# EAGLE board ESP8266 Relay (EAGLE 9.6.2)
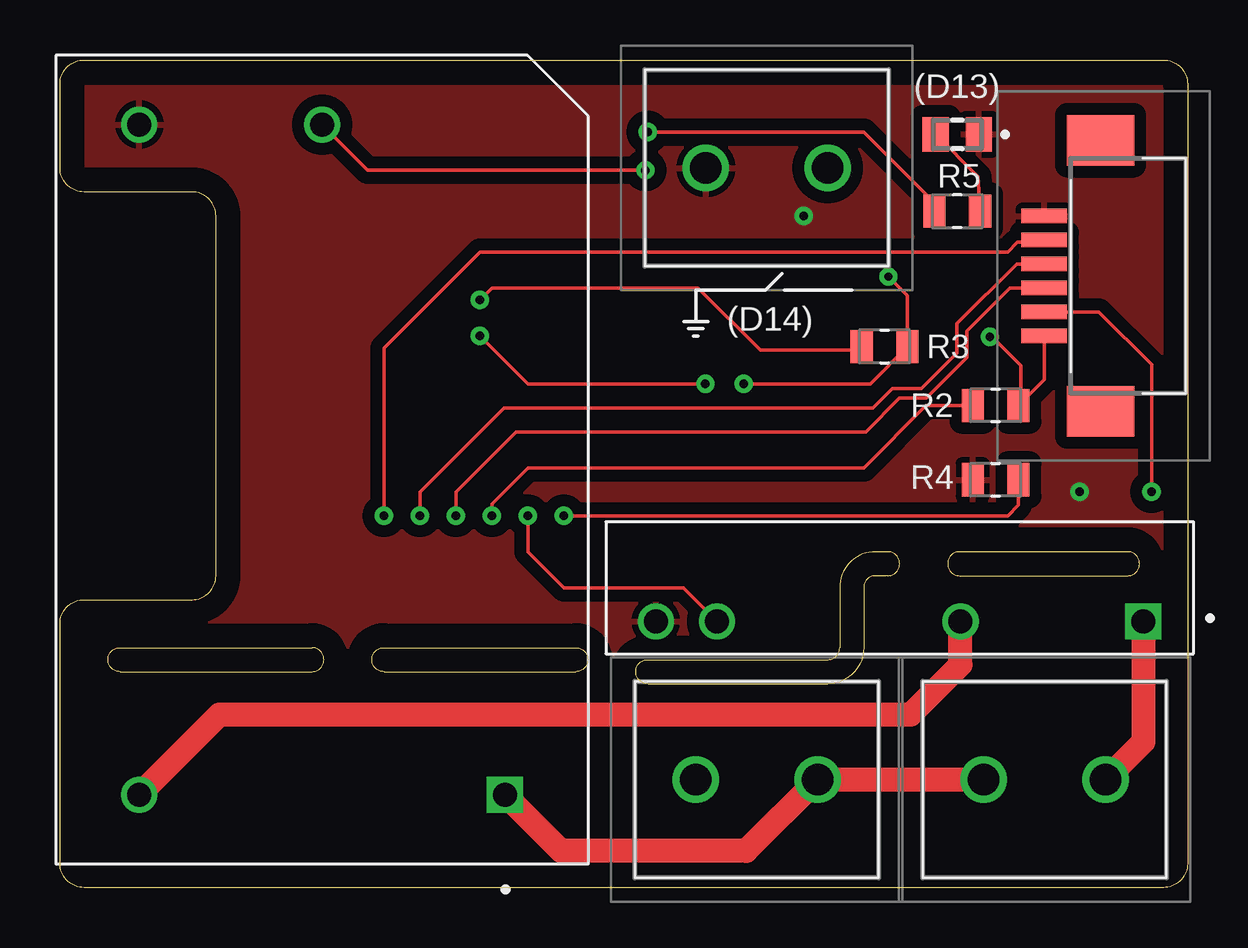
[diagram p0: board, top side]
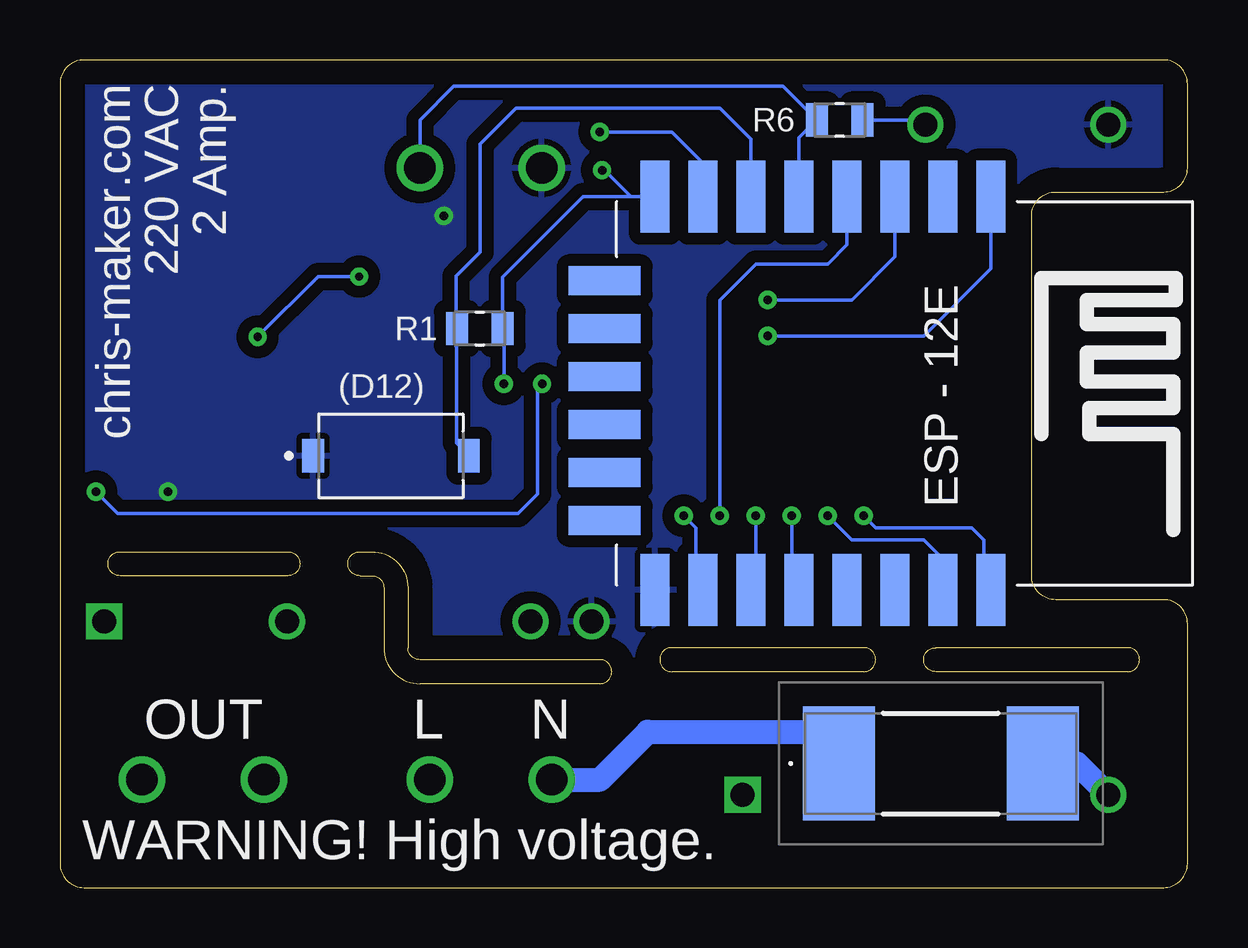
[diagram p1: board, bottom side, seen from below]

Size 47 x 34.5 mm. Coordinates in mm from the lower left corner, seen from the top.
Outline: 0,1 0,11 arc-90 1,12 5.5,12 arc90 6.5,13 6.5,28 arc90 5.5,29 1,29 arc-90 0,30 0,33.5 arc-90 1,34.5 46,34.5 arc-90 47,33.5 47,1 arc-90 46,0 1,0 arc-90 0,1
Outline: 2.5,9 10.5,9 arc90 11,9.5 arc90 10.5,10 2.5,10 arc90 2,9.5 arc90 2.5,9
Outline: 13.5,9 21.5,9 arc90 22,9.5 arc90 21.5,10 13.5,10 arc90 13,9.5 arc90 13.5,9
Outline: 37.5,14 arc90 37,13.5 arc90 37.5,13 44.5,13 arc90 45,13.5 arc90 44.5,14 37.5,14
Outline: 24.5,8.5 arc-90 24,9 arc-90 24.5,9.5 32,9.5 arc90 32.5,10 32.5,12.5 arc-90 34,14 34.5,14 arc-90 35,13.5 arc-90 34.5,13 34,13 arc90 33.5,12.5 33.5,10 arc-90 32,8.5 24.5,8.5
Copper layers (1*16): Top 0.035mm / dielectric 1.5mm / Bottom 0.035mm
Design rules "default": minimum track width 6mil, minimum drill 0.35mm, track to track 6mil, track to pad 6mil, pad to pad 6mil, via to via 6mil, smd to smd 6mil, copper to edge 40mil, drill to drill 6mil, minimum pad ring 10mil, minimum via ring 8mil, stop-mask expansion 4mil, vias tented up to drill 0mil, thermal gap 10mil

## Footprints (pad centres in the part's own frame; a part is rotated, then mirrored left to right if it is on the bottom)
LEDC2012X120N = smd 1.1 x 1.45: A 0.9,0; C -0.9,0
3404246922 = smd 3 x 4.75: 1 -4.25,0; 2 4.25,0
TB00650802BE = drill 1.3 pad 1.95: 1 0,0; 2 5.08,0
528520670 = smd 0.6 x 1.9: 1 -2.5,2.475; 2 -1.5,2.475; 3 -0.5,2.475; 4 0.5,2.475; 5 1.5,2.475; 6 2.5,2.475 | smd 2.1 x 2.8: 7 -5.65,0.125; 8 5.65,0.125
RELAY_G3MB-202PDC5 = drill 1 square: 1 -10.16,1.4 | drill 1: 2 -2.54,1.4; 3 7.62,1.4; 4 10.16,1.4
CONV_RAC02-3.3SGB = drill 1 pad 1.5 square: 1 -13.97,-7.62 | drill 1 pad 1.5: 2 -13.97,7.62; 3 13.97,7.62; 4 13.97,0
RESC2012X60N = smd 0.92 x 1.38: 1 -0.955,0; 2 0.955,0
SW_PTS636_SM43J_SMTR_LFS = smd 0.9 x 1.4: 1 -3.25,0; 2 3.25,0
ESP12E-SMD = smd 3 x 1.2: ADC -8.3,3.8; CH_PD -8.3,1.8; GND 8.1,-8.2; GPIO0 8.1,-2.2; GPIO2 8.1,-4.2; GPIO4 8.1,-0.2; GPIO5 8.1,1.8; GPIO12 -8.3,-4.2; GPIO13 -8.3,-6.2; GPIO14 -8.3,-2.2; GPIO15 8.1,-6.2; GPIO16 -8.3,-0.2; RESET -8.3,5.8; RXD0 8.1,3.8; TXD0 8.1,5.8; VCC -8.3,-8.2 | smd 1.2 x 3: CS0 -4.8,-10.3; GPIO9 -0.8,-10.3; GPIO10 1.2,-10.3; MISO -2.8,-10.3; MOSI 3.2,-10.3; SCLK 5.2,-10.3

## Placement (x,y rotation side)
D1  SML-LXT0805IW-TR  [LEDC2012X120N]  37.4,31.4 180 top
F1  3404.2469.22  [3404246922]  10.29,5.17 0 bottom
J1  TB006-508-02BE  [TB00650802BE]  26.5,4.5 0 top
J2  TB006-508-02BE  [TB00650802BE]  38.5,4.5 0 top
J3  TB006-508-02BE  [TB00650802BE]  32,30 180 top
J4  52852-0670  [528520670]  43.5,25.5 90 top
K1  G3MB-202PDC5  [RELAY_G3MB-202PDC5]  35,12.5 180 top
PS1  RAC02-3.3SGB  [CONV_RAC02-3.3SGB]  10.92,17.84 90 top
R1  10K  [RESC2012X60N]  29.5,23.3 0 bottom
R2  1OK  [RESC2012X60N]  39,20.1 0 top
R3  10K  [RESC2012X60N]  34.37,22.55 0 top
R4  10K  [RESC2012X60N]  39,17 0 top
R5  660  [RESC2012X60N]  37.4,28.2 180 top
R6  1OK  [RESC2012X60N]  14.5,32 180 bottom
S1  PTS636_SM43J_SMTR_LFS  [SW_PTS636_SM43J_SMTR_LFS]  33.2,18 0 bottom
U1  [ESP12E-SMD]  14,20.5 270 bottom

## Library data of the parts
D1 = SML-LXT0805IW-TR; AVAILABILITY: In Stock; DESCRIPTION: Red - LED Indication - Discrete 2V 0805 (2012 Metric); MF: Lumex Opto/Components; MP: SML-LXT0805IW-TR; PACKAGE: 0805 Lumex; PRICE: None; PURCHASE-URL: https://pricing.snapeda.com/search/part/SML-LXT0805IW-TR/?ref=eda
F1 = 3404.2469.22; DESCRIPTION: 2 A 250 V AC 125 V DC Fuse Board Mount (Cartridge Style Excluded) Surface Mount 2-SMD, Square End Block with Clip; HEIGHT: 4mm; MANUFACTURER_NAME: SCHURTER; MANUFACTURER_PART_NUMBER: 3404.2469.22; MOUSER_PART_NUMBER: 693-3404.2469.22; MOUSER_PRICE-STOCK: https://www.mouser.com/Search/Refine.aspx?Keyword=693-3404.2469.22
J1-J3 = TB006-508-02BE; DESCRIPTION: Fixed Terminal Blocks screw type, 5.08 , horizontal, 2 poles, CUI Blue, slotted screw, PCB mount; HEIGHT: 10.4mm; MANUFACTURER_NAME: CUI Inc.; MANUFACTURER_PART_NUMBER: TB006-508-02BE; MOUSER_PART_NUMBER: 490-TB006-508-02BE; MOUSER_PRICE-STOCK: https://www.mouser.co.uk/ProductDetail/CUI-Devices/TB006-508-02BE?qs=vLWxofP3U2wEdOVV%2FaT04w%3D%3D
J4 = 52852-0670; DESCRIPTION: FFC & FPC Connectors 1.0 FFC Non ZIF SMT HsgAssy6CktEmbsTpPkg; HEIGHT: 3mm; MANUFACTURER_NAME: Molex; MANUFACTURER_PART_NUMBER: 52852-0670; MOUSER_PART_NUMBER: 538-52852-0670; MOUSER_PRICE-STOCK: https://www.mouser.co.uk/ProductDetail/Molex/52852-0670?qs=%252BdbFUiYBkDZQc5IPgvIwgQ%3D%3D
K1 = G3MB-202PDC5; AVAILABILITY: Not in stock; DESCRIPTION: Solid State SPST-NO (1 Form A) 4-SIP; MF: Omron Automation; MP: G3MB-202P DC5; PACKAGE: SIP-4 Omron Automation; PRICE: None
PS1 = RAC02-3.3SGB; DESCRIPTION: 2W AC/DC-Converter 'POWERLINE' 3kV reg; MF: Recom Power; MP: RAC02-3.3SGB; PACKAGE: DIP-4 Recom Power; PRICE: None
R1-R6 = RC0805FR-07330RL; AVAILABILITY: In Stock; DESCRIPTION: 330 Ohms ±1% 0.125W, 1/8W Chip Resistor 0805 (2012 Metric) Moisture Resistant Thick Film; MF: Yageo; MP: RC0805FR-07330RL; PACKAGE: 2012 Rohm Semiconductor; PRICE: None; PURCHASE-URL: https://pricing.snapeda.com/search/part/RC0805FR-07330RL/?ref=eda
S1 = PTS636_SM43J_SMTR_LFS; AVAILABILITY: In Stock; DESCRIPTION: Tactile Switch SPST-NO Top Actuated Surface Mount; MF: C&K; MP: PTS636 SM43J SMTR LFS; PACKAGE: None; PRICE: None; PURCHASE-URL: https://pricing.snapeda.com/search/part/PTS636 SM43J SMTR LFS/?ref=eda
U1 = esp8266modules

## Nets
CH_PD: R3.1 U1.CH_PD
GND: D1.C J3.2 J4.6 K1.4 PS1.3 R4.1 S1.1 U1.GND
GPIO0: J4.3 U1.GPIO0
GPIO2: R2.1 U1.GPIO2
GPIO12: R1.1 S1.2 U1.GPIO12
GPIO13: R5.2 U1.GPIO13
GPIO14: J3.1 R6.2 U1.GPIO14
GPIO15: R4.2 U1.GPIO15
GPIO16: K1.3 U1.GPIO16
N$1: F1.2 K1.2 PS1.2
N$2: F1.1 J1.1
N$3: J1.2 J2.1 PS1.1
N$4: J2.2 K1.1
N$9: D1.A R5.1
RESET: J4.2 U1.RESET
RX: J4.5 U1.TXD0
TX: J4.4 U1.RXD0
VCC: J4.1 PS1.4 R1.2 R2.2 R3.2 R6.1 U1.VCC

## Tracks (layer width: path | path; a pad name or v marks a point on that pad's centre or on a via)
CH_PD  (via drill 0.35)
  Top 0.152: v17.5,24.5 18,25 26.6,25 29.2,22.4 33.27,22.4 R3.1
  Bottom 0.152: v17.5,24.5 14,24.5 12.2,26.3 U1.CH_PD
GND  (via drill 0.35)
  other vias: 31,28 42.5,16.5
  pour Bottom (isolate 0.5): -1.4,35.6 -1.4,-0.8 48.1,-0.8 48.1,35.6
  pour Top (isolate 0.5): -2.1,36.3 -2.1,-1.5 49,-1.5 49,36.3
GPIO0  (via drill 0.35)
  Top 0.152: v16.5,15.5 16.5,16.5 19,19 33.59,19 34.99,20.41 36.1,20.41 37.8,22.09 37.8,23.2 39.59,25 J4.3
  Bottom 0.152: v16.5,15.5 16.5,13.5 16,13 16,12.6 U1.GPIO0
GPIO2  (via drill 0.35)
  Top 0.152: v18,15.5 18,16 19.5,17.5 33.5,17.5 36.1,20.1 R2.1
  Bottom 0.152: U1.GPIO2 18,12.6 v18,15.5
GPIO12
  Bottom 0.152: U1.GPIO12 18.2,31.2 19.5,32.5 28,32.5 29.5,31 29.5,26.5 30.5,25.5 30.5,22.55 30.48,22.52 | R1.1 30.48,23.32 30.48,22.52 | S1.2 30.48,18.53 30.48,22.52
GPIO13  (via drill 0.35)
  Top 0.152: v24.5,31.5 33.5,31.5 36.45,28.55 R5.2
  Bottom 0.152: U1.GPIO13 20.2,30.2 21.5,31.5 v24.5,31.5
GPIO14
  Bottom 0.152: U1.GPIO14 16.2,31.25 R6.2 16.86,33.4 30.6,33.4 32,32 J3.1
GPIO15  (via drill 0.35)
  Top 0.152: R4.2 39.95,15.96 39.5,15.5 v21,15.5
  Bottom 0.152: v21,15.5 20.5,15 20.5,12.4 U1.GPIO15
GPIO16  (via drill 0.35)
  Top 0.152: v19.5,15.5 19.5,14 21,12.5 25.98,12.5 K1.3
  Bottom 0.152: U1.GPIO16 14.2,26.8 15,26 18,26 19.5,24.5 v19.5,15.5
N$1
  Top 1: PS1.2 6.64,7.2 35.45,7.2 37.54,9.29 K1.2
  Bottom 1: PS1.2 4.61,5.17 F1.2
N$2
  Bottom 1: J1.1 24.5,4.5 22.5,6.5 14.5,6.5 14.5,4.5 14.54,4.54 F1.1
N$3
  Top 1: J2.1 J1.2 28.6,1.52 20.89,1.52 PS1.1
N$4
  Top 1: K1.1 45.16,6.08 J2.2
N$9
  Top 0.152: R5.1 38.26,29.64 D1.A
RESET  (via drill 0.35)
  Top 0.152: v17.5,23 19.5,21 v26.9,21 | v45.5,16.5 45.5,21.8 43.3,24 J4.2
  Bottom 0.152: v17.5,23 11,23 8.2,25.8 U1.RESET | v26.9,21 27.1,20.8 27.1,16.4 27.9,15.6 44.6,15.6 v45.5,16.5
RX  (via drill 0.35)
  Top 0.152: v13.5,15.5 13.5,22.5 17.5,26.5 39.5,26.5 39.9,26.9 40.92,26.9 J4.5
  Bottom 0.152: v13.5,15.5 13,15 9,15 8.5,14.5 8.5,12.7 U1.TXD0
TX  (via drill 0.35)
  Top 0.152: v15,15.5 15,16.5 18.5,20 33.88,20 34.69,20.81 35.91,20.81 37.39,22.29 37.39,23.51 39.88,26 J4.4
  Bottom 0.152: v15,15.5 14,14.5 11,14.5 10.2,13.7 U1.RXD0
VCC  (via drill 0.35)
  Top 0.152: v24.4,29.9 12.83,29.9 PS1.4 | v28.5,21 33.77,21 R3.2 35.33,24.68 v34.53,25.47 | J4.1 41.02,21.17 R2.2 40.05,20.2 40.05,21.75 38.85,22.96 v38.76,22.96
  Bottom 0.152: PS1.4 11.12,32 R6.1 | v24.4,29.9 24.3,29.9 23.2,28.8 U1.VCC 25.2,28.8 28.55,25.45 R1.2 28.5,23.25 v28.5,21 | v34.53,25.47 36.25,25.47 v38.76,22.96

## Text on the board
tPlace: (D13) | (D14)
bPlace: 2 Amp. | 220 VAC | chris-maker.com | (D12) | N | L | OUT
bNames: WARNING! High voltage.